# Altium PCB PCB3.PcbDoc
Units mil, origin at the board's own origin, x right, y up, seen from the top; angles counter-clockwise.
Board outline 3543.31 x 3543.31 mil, 2 copper layers (Top Layer, Bottom Layer); 3 components, 19 nets, 68 pads, 20 vias.
Unrouted connection lines stored in the file: 21.
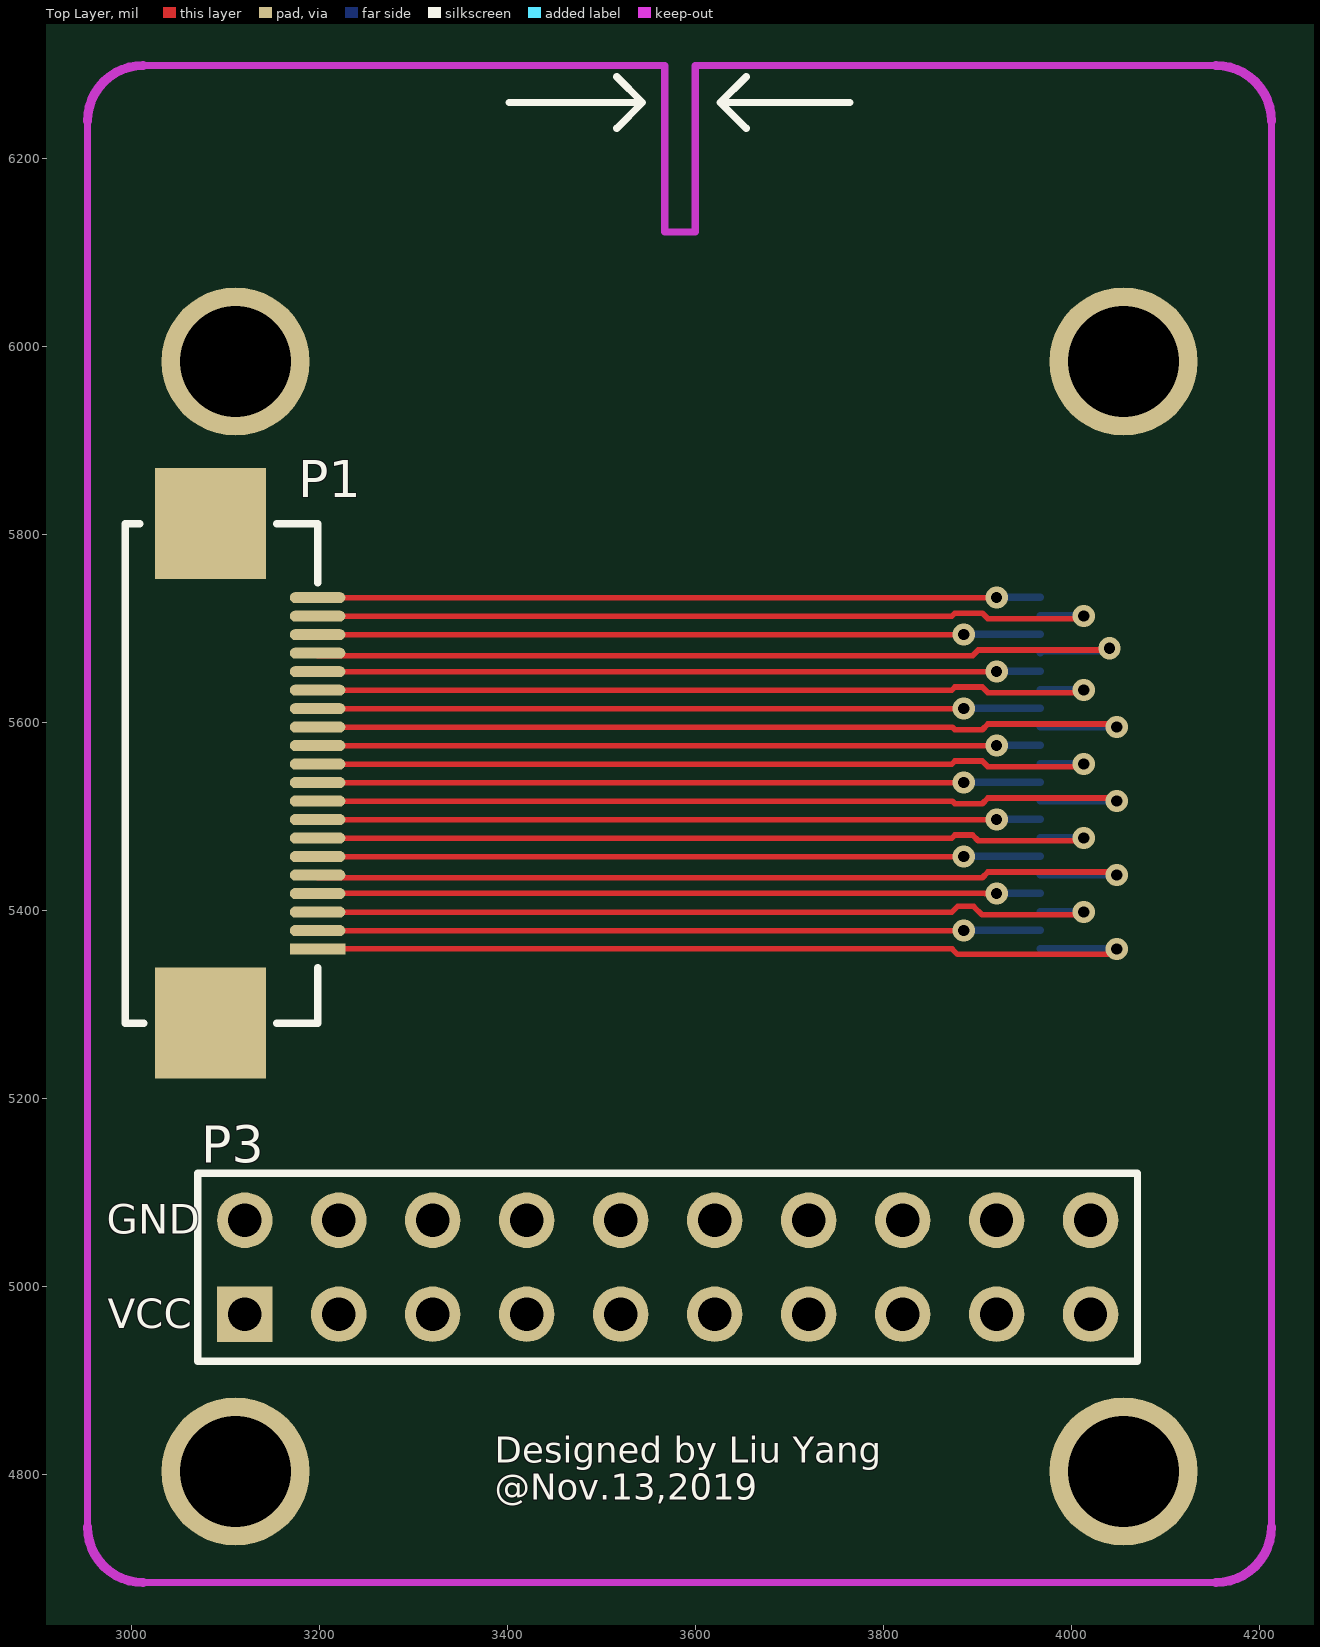
[diagram p0: Top Layer view]
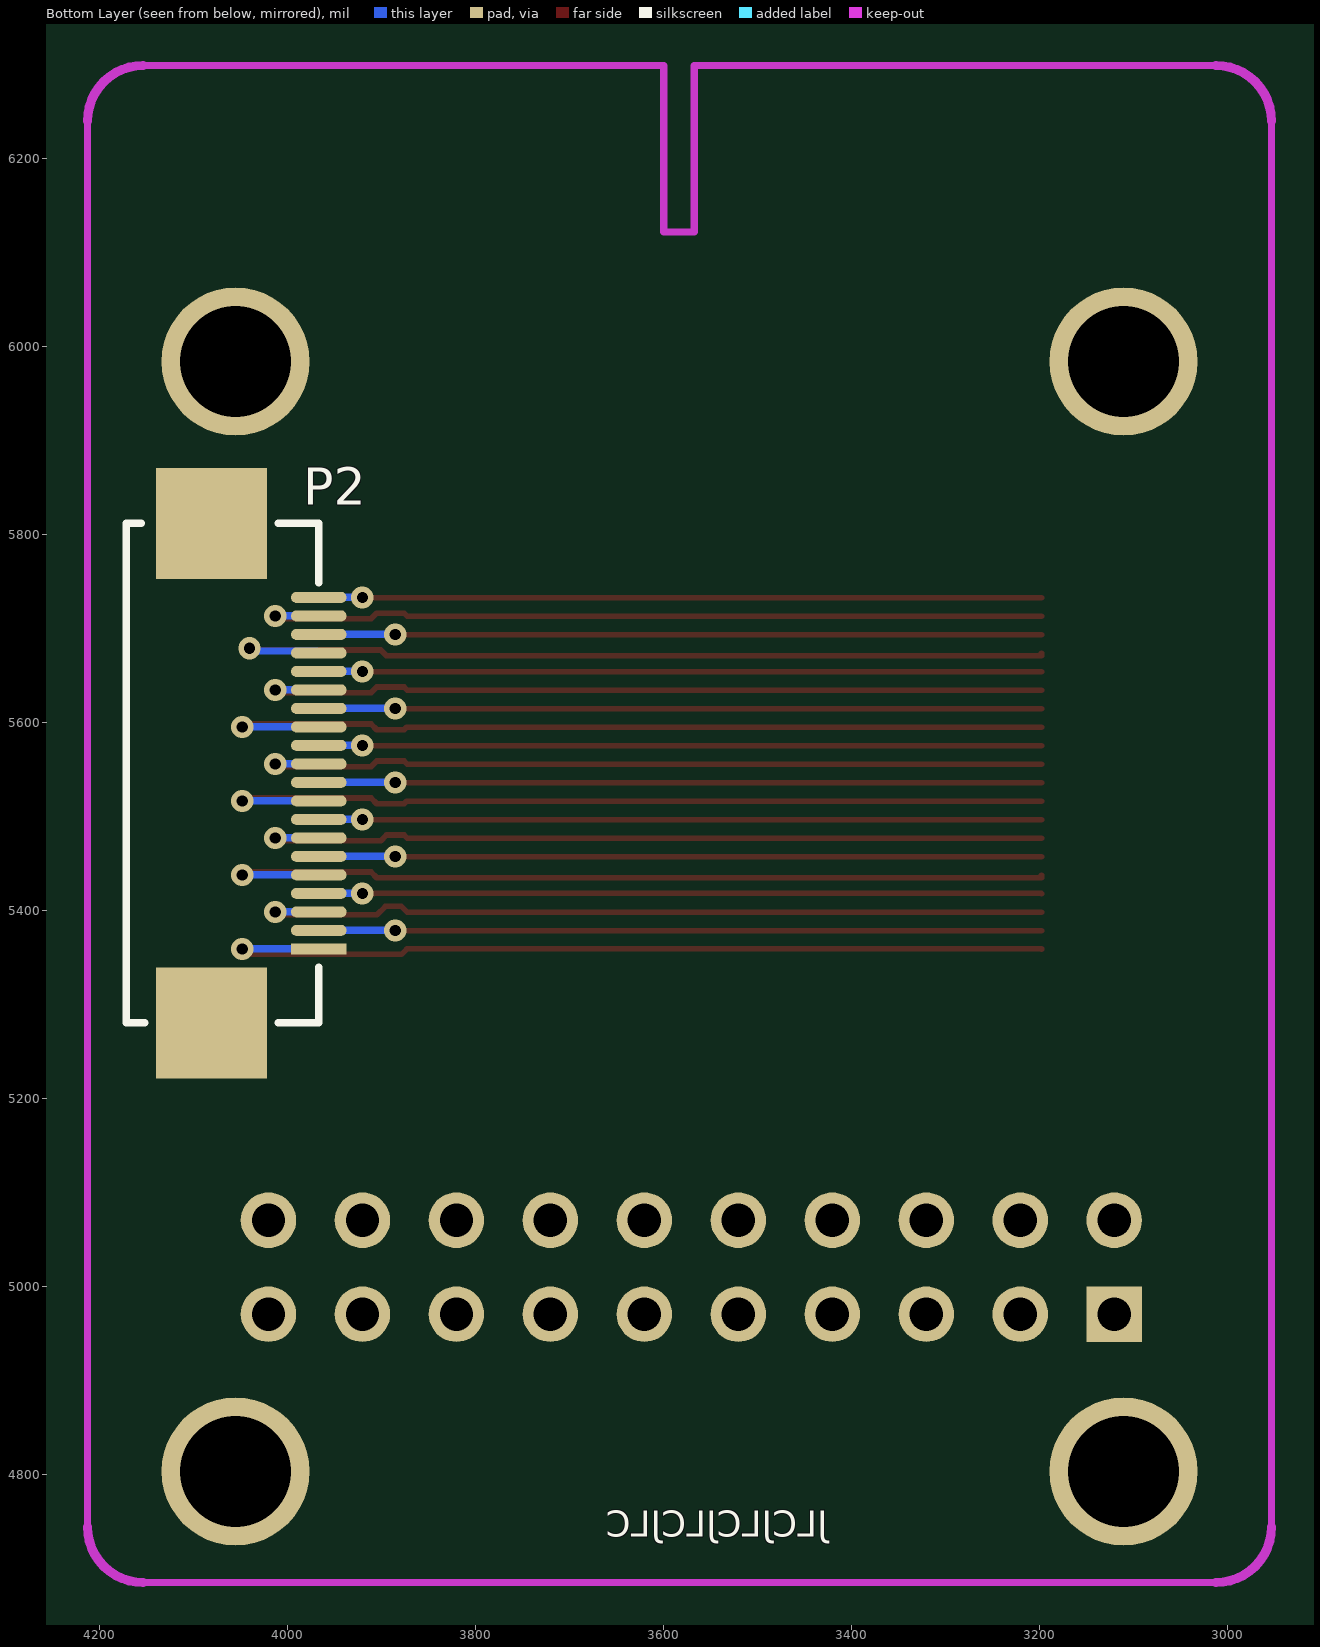
[diagram p1: Bottom Layer view, seen from below]

## Layer stack, top to bottom
Top Solder: solder mask 0.4, Solder Resist, Dk 3.5
Top Layer: signal copper 1.4
Dielectric 1: dielectric 12.6, FR-4, Dk 4.8
Bottom Layer: signal copper 1.4
Bottom Solder: solder mask 0.4, Solder Resist, Dk 3.5

## Board outline
2000,3000 5543.31,3000 5543.31,6543.31 2000,6543.31

## Design rules (kind name [scope] priority, off if disabled: settings)
Clearance [All] p1: gap=7.87
PolygonConnect [All] p1: connectstyle=Relief reliefconductorwidth=10 reliefentries=4 polygonreliefangle="90 Angle" airgapwidth=10
RoutingVias [All] p1: holewidth=11.81 width=23.62 viastyle="Through Hole" minholewidth=11.81 minwidth=23.62 maxholewidth=31.5 maxwidth=39.37
SolderMaskExpansion [All] p1: expansion=4
Width [All] p1: maxlimit=20 minlimit=5 preferedwidth=6
30 further rules are at their usual default settings.

## Classes and differential pairs
component class Sheet1: P1 P3

## Components (designator, comment, footprint, x,y, rotation, side; value= is the part's Value field where it differs from the comment)
P1 "Header 20" FPC20Pin 3197.52,5359 r180 top locked
P2 "Header 20" FPC20Pin 3966.54,5359.25 r0 bottom locked
P3 "Header 10X2" HDR2X10 3120.08,4970.47 r0 top locked

## Footprints (in the part's own frame and the unit in brackets; to place one, negate y for a bottom-side part, rotate by r counter-clockwise, add the part's x,y. Pads: shape width x height; smd on the part's side, far side on the other; paste and mask are expansions set on the pad)
FPC20Pin [mm]
  rect 1.5x0.3 smd: 1(0,0)
  oval 1.5x0.3 smd: 2(0,-0.5) 3(0,-1) 4(0,-1.5) 5(0,-2) 6(0,-2.5) 7(0,-3) 8(0,-3.5) 9(0,-4) 10(0,-4.5) 11(0,-5) 12(0,-5.5) 13(0,-6) 14(0,-6.5) 15(0,-7) 16(0,-7.5) 17(0,-8) 18(0,-8.5) 19(0,-9) 20(0,-9.5)
  rect 3x3 smd: 21(2.9,2) 22(2.9,-11.5)
  silkscreen extent 0,-11.5 5.2,2
HDR2X10 [mm] "Connector; Header; 10x2 Position"
  rect 1.5x1.5 hole 0.9: 1(0,0)
  round 1.5 hole 0.9: 2(0,2.54) 3(2.54,0) 4(2.54,2.54) 5(5.08,0) 6(5.08,2.54) 7(7.62,0) 8(7.62,2.54) 9(10.16,0) 10(10.16,2.54) 11(12.7,0) 12(12.7,2.54) 13(15.24,0) 14(15.24,2.54) 15(17.78,0) 16(17.78,2.54) 17(20.32,0) 18(20.32,2.54) 19(22.86,0) 20(22.86,2.54)
  silkscreen extent -1.27,-1.27 24.13,3.81

## Part data
P1 P2: "Header, 20-Pin"
P3: "Header, 10-Pin, Dual row"

## Free pads (board coordinates)
  round 157.48 hole 118.11: 0(3110.24,5984.25) 1(4055.12,5984.25) 2(4055.12,4803.15) 3(3110.24,4803.15)

## Via types
v1: diameter 23.62, hole 11.81, Top Layer to Bottom Layer, 20 vias

## Nets (pads, with @x,y where several pads share a name; then routed paths per layer and width w, separated by ;. In a path a pad name is that pad's centre, name@x,y a point inside that pad or via, vN(x,y) a via of type N, cw(c..) or ccw(c..) an arc to the next point about the centre after c; other vN are vias at no path point)
LEFT_D0: P1.16 P2.16 P3.16 | length 769.1
  Top Layer w6: P1.16 3919.94,5654.27 v1(3920.2,5654.53)
  Bottom Layer w7.87: v1(3920.2,5654.53) P2.16
LEFT_D1: P1.15 P2.15 P3.15 | length 866.8
  Top Layer w6: P1.15 3872.47,5634.59 3875.72,5637.84 3904.8,5637.84 3910.8,5631.84 4009.87,5631.84 v1(4012.87,5634.84)
  Bottom Layer w7.87: P2.15 v1(4012.87,5634.84)
LEFT_D2: P1.14 P2.14 P3.14 | length 769.1
  Top Layer w6: P1.14 3884.86,5614.9 v1(3885.12,5615.16)
  Bottom Layer w7.87: v1(3885.12,5615.16) P2.14
LEFT_D3: P1.13 P2.13 P3.13 | length 936.7
  Top Layer w6: P1.13 3872.97,5595.22 3875.72,5592.47 3904.8,5592.47 3910.8,5598.47 4044.95,5598.47 v1(4047.95,5595.47)
  Bottom Layer w7.87: P2.13 v1(4047.95,5595.47)
LEFT_D4: P1.12 P2.12 P3.12 | length 769.1
  Top Layer w6: P1.12 3919.94,5575.53 v1(3920.2,5575.79)
  Bottom Layer w7.87: v1(3920.2,5575.79) P2.12
LEFT_D5: P1.11 P2.11 P3.11 | length 866.8
  Top Layer w6: P1.11 3872.47,5555.85 3875.72,5559.1 3904.8,5559.1 3910.8,5553.1 4009.87,5553.1 v1(4012.87,5556.1)
  Bottom Layer w7.87: P2.11 v1(4012.87,5556.1)
LEFT_D6: P1.10 P2.10 P3.10 | length 769.1
  Top Layer w6: P1.10 3884.86,5536.16 v1(3885.12,5536.42)
  Bottom Layer w7.87: v1(3885.12,5536.42) P2.10
LEFT_D7: P1.9 P2.9 P3.9 | length 936.7
  Top Layer w6: P1.9 3872.97,5516.48 3875.72,5513.73 3904.8,5513.73 3910.8,5519.73 4044.95,5519.73 v1(4047.95,5516.73)
  Bottom Layer w7.87: P2.9 v1(4047.95,5516.73)
LEFT_GND: P1.2 P1.17 P2.2 P2.17 P3.2 P3.17 | length 1693.8
  Top Layer w6: P1.2 3884.86,5378.69 v1(3885.12,5378.94) ; P1.17 3197.52,5671.21 3894.64,5671.21 3900.64,5677.21 4038.43,5677.21 v1(4040.35,5679.13)
  Bottom Layer w7.87: v1(3885.12,5378.94) P2.2 ; P2.17 3968.5,5676.18 4037.4,5676.18 v1(4040.35,5679.13)
LEFT_HREF: P1.6 P2.6 P3.6 | length 769.1
  Top Layer w6: P1.6 3884.86,5457.43 v1(3885.12,5457.68)
  Bottom Layer w7.87: v1(3885.12,5457.68) P2.6
LEFT_NC1: P1.18 P2.18 P3.18 | length 769.1
  Top Layer w6: P1.18 3884.86,5693.65 v1(3885.12,5693.9)
  Bottom Layer w7.87: v1(3885.12,5693.9) P2.18
LEFT_NC2: P1.19 P2.19 P3.19 | length 866.8
  Top Layer w6: P1.19 3872.47,5713.33 3875.72,5716.58 3904.8,5716.58 3910.8,5710.58 4009.87,5710.58 v1(4012.87,5713.58)
  Bottom Layer w7.87: P2.19 v1(4012.87,5713.58)
LEFT_NC3: P1.20 P2.20 P3.20 | length 769.1
  Top Layer w6: P1.20 3919.94,5733.02 v1(3920.2,5733.27)
  Bottom Layer w7.87: v1(3920.2,5733.27) P2.20
LEFT_PCLK: P1.7 P2.7 P3.7 | length 866.8
  Top Layer w6: P1.7 3872.47,5477.11 3875.72,5480.36 3894.51,5480.36 3900.51,5474.36 4009.87,5474.36 v1(4012.87,5477.36)
  Bottom Layer w7.87: P2.7 v1(4012.87,5477.36)
LEFT_SCL: P1.3 P2.3 P3.3 | length 869.2
  Top Layer w6: P1.3 3872.47,5398.37 3878.63,5404.53 3895.67,5404.53 3904.57,5395.62 4009.87,5395.62 v1(4012.87,5398.62)
  Bottom Layer w7.87: P2.3 v1(4012.87,5398.62)
LEFT_SDA: P1.4 P2.4 P3.4 | length 769.4
  Top Layer w6: P1.4 3197.87,5418.4 3907.64,5418.4 3907.99,5418.06 3919.94,5418.06 v1(3920.2,5418.31)
  Bottom Layer w7.87: v1(3920.2,5418.31) P2.4
LEFT_SYNC: P1.5 P2.5 P3.5 | length 938.3
  Top Layer w6: P1.5 3197.52,5434.99 3904.8,5434.99 3910.8,5440.99 4044.95,5440.99 v1(4047.95,5437.99)
  Bottom Layer w7.87: P2.5 v1(4047.95,5437.99)
LEFT_VCC: P1.1 P2.1 P3.1 | length 937
  Top Layer w6: P1.1 3197.52,5359.25 3872.72,5359.25 3878.63,5353.35 4042.05,5353.35 v1(4047.95,5359.25)
  Bottom Layer w7.87: P2.1 v1(4047.95,5359.25)
LEFT_XCLK: P1.8 P2.8 P3.8 | length 769.1
  Top Layer w6: P1.8 3919.94,5496.8 v1(3920.2,5497.05)
  Bottom Layer w7.87: v1(3920.2,5497.05) P2.8
pads on no net: P1.21 P1.22 P2.21 P2.22

## Keep-outs
Keep-Out Layer:
  lines w7.87: 2952.76,4744.09 2952.76,4881.89 2952.76,6141.73 2952.76,6240.16 ; 3011.81,4685.04 4153.54,4685.04 ; 3011.81,6299.21 3267.72,6299.21 3566.93,6299.21 3566.93,6122.05 3599.41,6122.05 3599.41,6299.21 3897.64,6299.21 4153.54,6299.21 ; 4212.6,4744.09 4212.6,4881.89 4212.6,6141.73 4212.6,6240.16
  lines w10: 2952.76,4744.09 ccw(c3011.81,4744.09) 3011.81,4685.04 ; 2952.76,6240.16 cw(c3011.81,6240.16) 3011.81,6299.21 ; 4153.54,4685.04 ccw(c4153.54,4744.09) 4212.6,4744.09 ; 4153.54,6299.21 cw(c4153.54,6240.16) 4212.6,6240.16

## Silkscreen, mask and mechanical layers (free items; w line width, h text height)
Top Overlay:
  lines w7.87: 3401.57,6259.84 3543.31,6259.84 ; 3515.75,6232.28 3543.31,6259.84 ; 3515.75,6287.4 3543.31,6259.84 ; 3653.54,6232.28 3625.98,6259.84 ; 3653.54,6287.4 3625.98,6259.84 ; 3763.78,6259.84 3625.98,6259.84 ; 3543.31,6259.84 3543.31,6259.84 ; 3625.98,6259.84 3625.98,6259.84 ; 3625.98,6259.84 3625.98,6259.84
  text "Designed by Liu Yang" at 3385.83,4803.15 h47.24
  text "@Nov.13,2019" at 3385.83,4763.78 h47.24
Bottom Overlay:
  text "JLCJLCJLCJLC" at 3425.2,4724.41 h47.24

## Text inside footprints (layer, text, board x,y; h text height)
P3: Top Overlay "GND" at 2973.43,5056.1 h31.5; Top Overlay "VCC" at 2974.41,4955.71 h31.5